# EAGLE board version1b-dump (EAGLE 6.1)
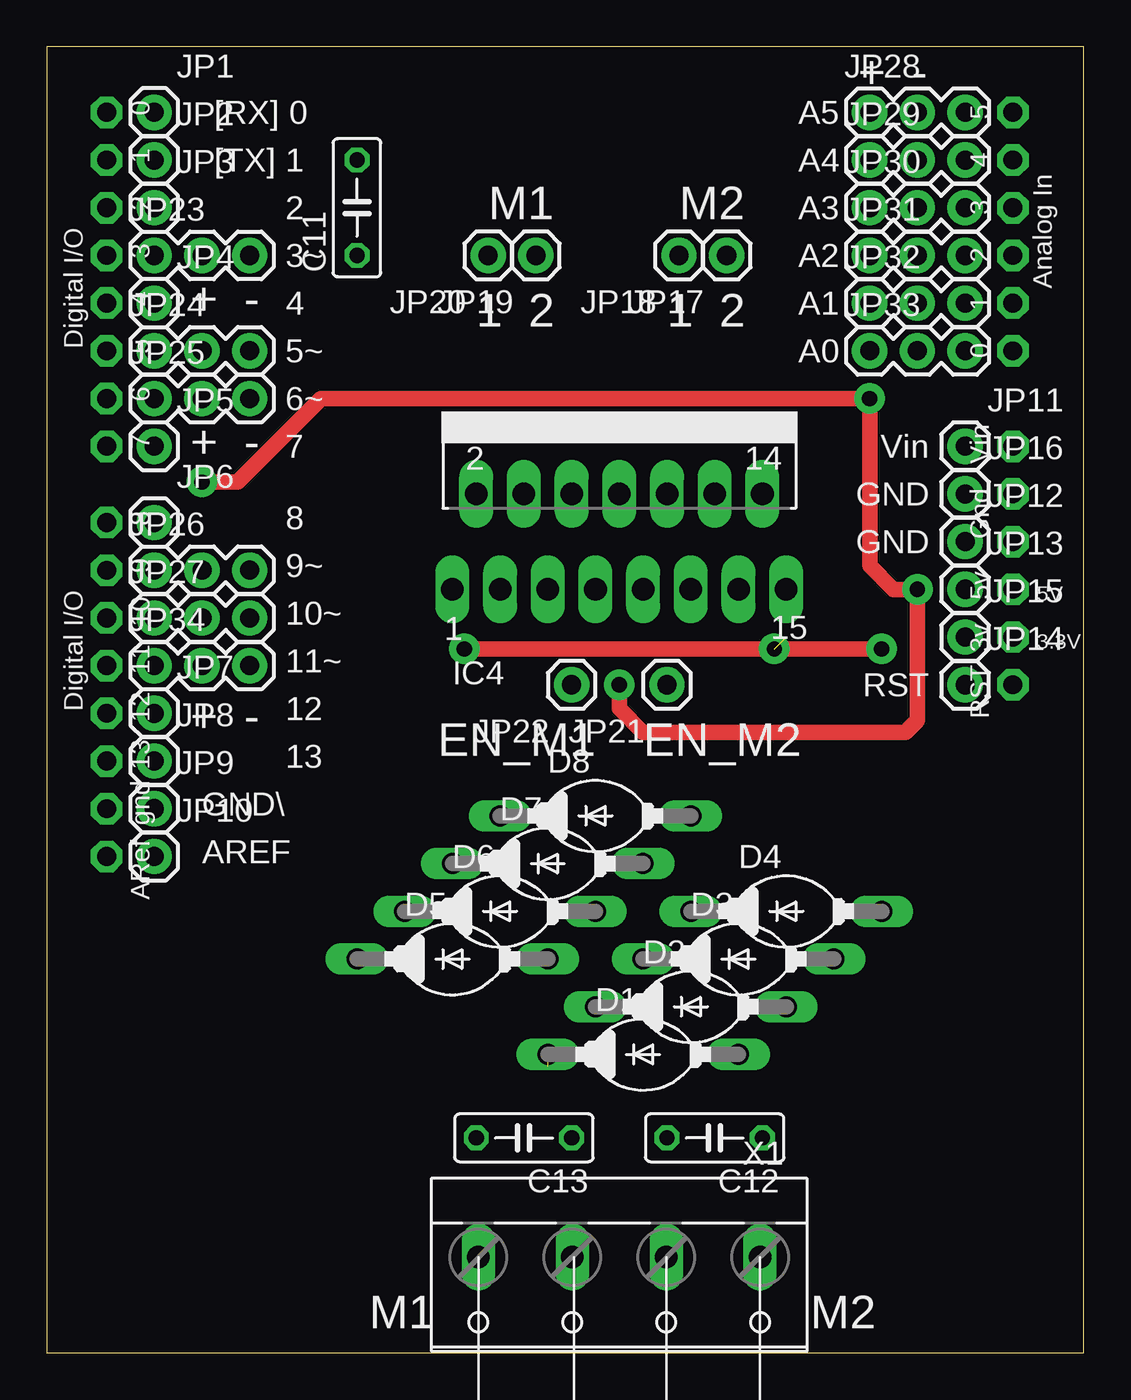
[diagram p0: board, top side]
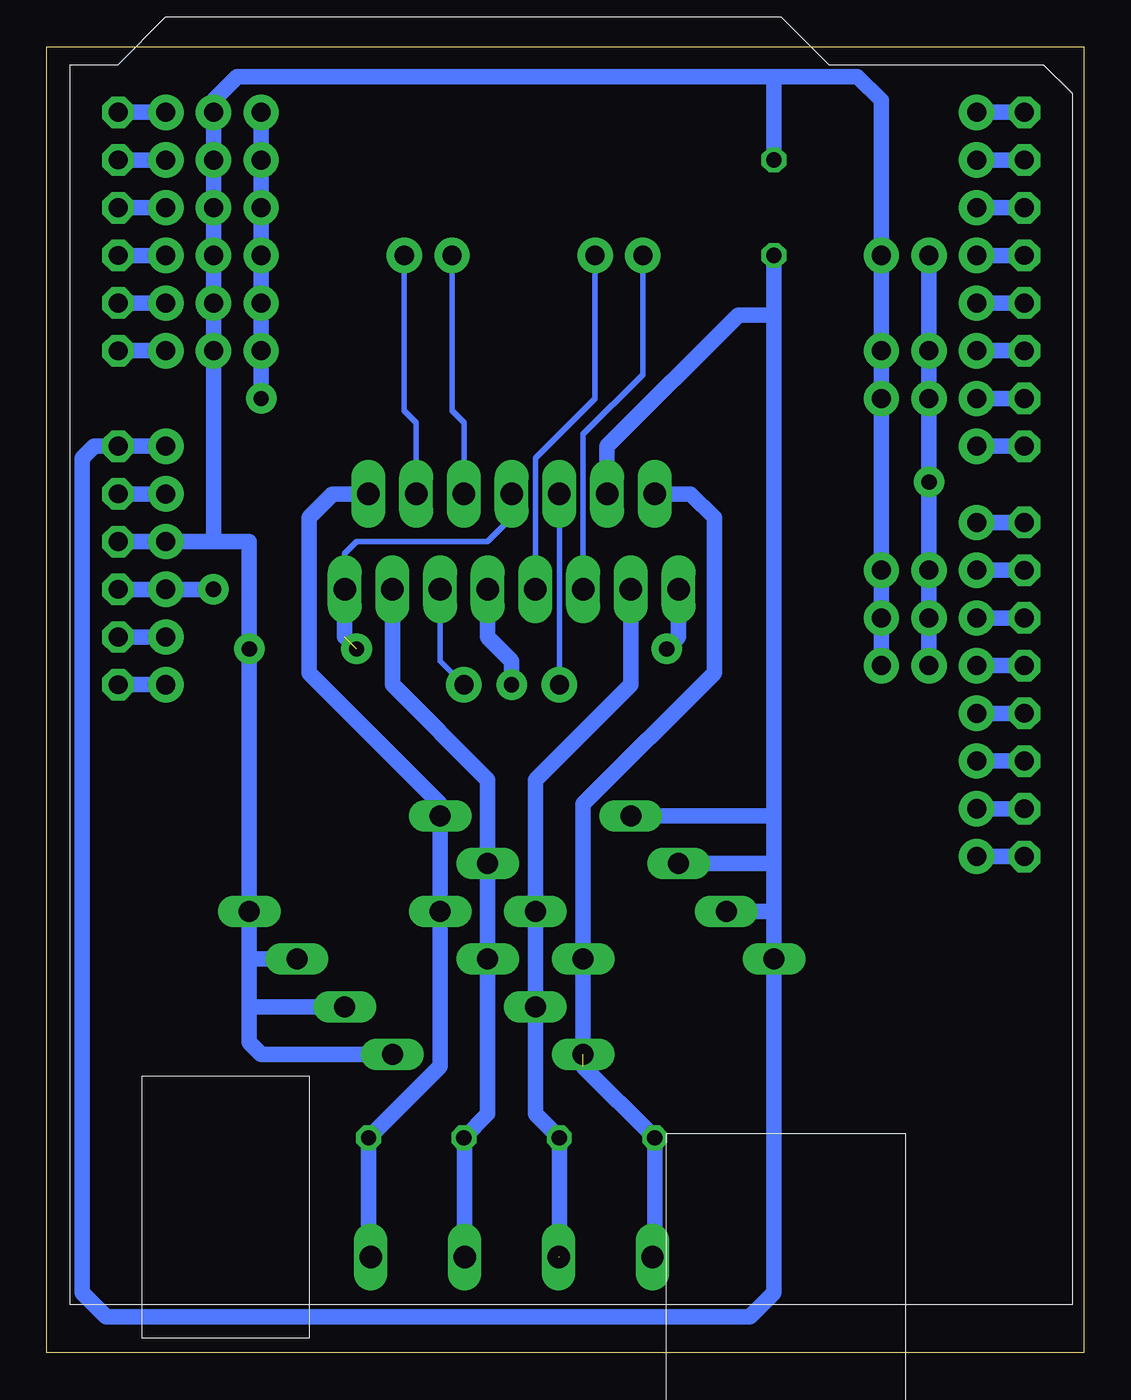
[diagram p1: board, bottom side, seen from below]

Size 55.23 x 69.52 mm. Coordinates in mm from the lower left corner, seen from the top.
Outline: 0,0 55.23,0 55.23,69.52 0,69.52 0,0
Copper layers (1*16): Top 0.035mm / dielectric 1.5mm / Bottom 0.035mm
Design rules: minimum track width 10mil, minimum drill 24mil, track to track 6mil, track to pad 6mil, pad to pad 6mil, via to via 6mil, smd to smd 6mil, copper to edge 40mil, drill to drill 8mil, minimum pad ring 10mil, minimum via ring 8mil, stop-mask expansion 4mil, vias tented up to drill 0mil, thermal gap 10mil

## Footprints (pad centres in the part's own frame; a part is rotated, then mirrored left to right if it is on the bottom)
C050-025X075 = drill 0.813 octagon: 1 -2.54,0; 2 2.54,0
DO204-10 = drill 1.118 long: A 5.08,0; C -5.08,0
MULTIWATT-15 = drill 1.2 long: 1 -8.89,-7.62; 2 -7.62,-2.54; 3 -6.35,-7.62; 4 -5.08,-2.54; 5 -3.81,-7.62; 6 -2.54,-2.54; 7 -1.27,-7.62; 8 0,-2.54; 9 1.27,-7.62; 10 2.54,-2.54; 11 3.81,-7.62; 12 5.08,-2.54; 13 6.35,-7.62; 14 7.62,-2.54; 15 8.89,-7.62
1X01 = drill 1.016 pad 1.88: 1 0,0
1X03 = drill 1.016 pad 1.88: 1 0,0; 2 2.54,0; 3 5.08,0
ARDUINO-NOHOLE = drill 1 pad 1.676 octagon: 3V 35.56,2.54; 5V 38.1,2.54; A0 50.8,2.54; A1 53.34,2.54; A2 55.88,2.54; A3 58.42,2.54; A4 60.96,2.54; A5 63.5,2.54; AREF 23.876,50.8; D0 63.5,50.8; D1 60.96,50.8; D2 58.42,50.8; D3 55.88,50.8; D4 53.34,50.8; D5 50.8,50.8; D6 48.26,50.8; D7 45.72,50.8; D8 41.656,50.8; D9 39.116,50.8; D10 36.576,50.8; D11 34.036,50.8; D12 31.496,50.8; D13 28.956,50.8; GND 26.416,50.8; GND1 43.18,2.54; GND2 40.64,2.54; RESET 33.02,2.54; VIN 45.72,2.54
W237-4 = drill 1.194 long: 1 -7.5,-1.27; 2 -2.5,-1.27; 3 2.5,-1.27; 4 7.5,-1.27

## Placement (x,y rotation side)
C11  100uF  [C050-025X075]  16.51,60.96 90 top
C12  1uF  [C050-025X075]  35.56,11.43 180 top
C13  1uF  [C050-025X075]  25.4,11.43 180 top
D1  1N5059  [DO204-10]  31.75,15.88 0 top
D2  1N5059  [DO204-10]  34.29,18.41 0 top
D3  1N5059  [DO204-10]  36.83,20.95 0 top
D4  1N5059  [DO204-10]  39.37,23.5 0 top
D5  1N5059  [DO204-10]  21.59,20.95 0 top
D6  1N5059  [DO204-10]  24.13,23.5 0 top
D7  1N5059  [DO204-10]  26.67,26.04 0 top
D8  1N5059  [DO204-10]  29.21,28.57 0 top
IC4  L298  [MULTIWATT-15]  30.48,48.26 0 top
JP1  M01PTH  [1X01]  5.71,66.04 0 top
JP2  M01PTH  [1X01]  5.71,63.5 0 top
JP3  M01PTH  [1X01]  5.71,60.96 0 top
JP4  M01PTH  [1X01]  5.71,55.88 0 top
JP5  M01PTH  [1X01]  5.71,48.26 0 top
JP6  M01PTH  [1X01]  5.71,44.2 0 top
JP7  M01PTH  [1X01]  5.71,34.04 0 top
JP8  M01PTH  [1X01]  5.71,31.5 0 top
JP9  M01PTH  [1X01]  5.71,28.96 0 top
JP10  M01PTH  [1X01]  5.71,26.42 0 top
JP11  M01PTH  [1X01]  48.89,48.26 0 top
JP12  M01PTH  [1X01]  48.89,43.18 0 top
JP13  M01PTH  [1X01]  48.89,40.64 0 top
JP14  M01PTH  [1X01]  48.89,35.56 0 top
JP15  M01PTH  [1X01]  48.89,38.1 0 top
JP16  M01PTH  [1X01]  48.89,45.72 0 top
JP17  M01PTH  [1X01]  36.2,58.42 180 top
JP18  M01PTH  [1X01]  33.66,58.42 180 top
JP19  M01PTH  [1X01]  26.04,58.42 180 top
JP20  M01PTH  [1X01]  23.49,58.42 180 top
JP21  M01PTH  [1X01]  33.02,35.56 180 top
JP22  M01PTH  [1X01]  27.94,35.56 180 top
JP23  [1X03]  5.71,58.42 0 top
JP24  [1X03]  5.71,53.34 0 top
JP25  [1X03]  5.71,50.8 0 top
JP26  [1X03]  5.71,41.66 0 top
JP27  [1X03]  5.71,39.12 0 top
JP28  [1X03]  43.81,66.04 0 top
JP29  [1X03]  43.81,63.5 0 top
JP30  [1X03]  43.81,60.96 0 top
JP31  [1X03]  43.81,58.42 0 top
JP32  [1X03]  43.81,55.88 0 top
JP33  [1X03]  43.81,53.34 0 top
JP34  [1X03]  5.71,36.58 0 top
U$1  ARDUINO-NOHOLE  [ARDUINO-NOHOLE]  53.98,2.54 90 top
X1  [W237-4]  30.48,3.81 180 top

## Library data of the parts
C11-C13 = rcl
D1-D8 = diode
IC4 = st-microelectronics; MPN: L298N; OC_FARNELL: 1589425; OC_NEWARK: 32M1527
JP1-JP34 = SparkFun
U$1 = adafruit
X1 = con-wago-500; OC_FARNELL: unknown; OC_NEWARK: unknown

## Nets
N$1: JP1.1 U$1.D0
N$2: JP2.1 U$1.D1
N$3: JP28.3 U$1.A5
N$4: JP3.1 U$1.D2
N$5: JP4.1 U$1.D4
N$6: JP29.3 U$1.A4
N$7: JP5.1 U$1.D7
N$8: JP6.1 U$1.D8
N$9: JP30.3 U$1.A3
N$10: JP7.1 U$1.D12
N$11: JP8.1 U$1.D13
N$12: JP31.3 U$1.A2
N$13: JP9.1 U$1.GND
N$14: JP23.1 U$1.D3
N$15: JP24.1 U$1.D5
N$16: JP33.3 U$1.A0
N$17: JP32.3 U$1.A1
N$18: JP10.1 U$1.AREF
N$19: JP14.1 U$1.RESET
N$20: JP25.1 U$1.D6
N$21: JP15.1 U$1.3V
N$22: JP16.1 U$1.GND1
N$23: JP27.1 U$1.D10
N$24: C13.2 D1.C D5.A IC4.2 X1.4
N$25: C13.1 D2.C D6.A IC4.3 X1.3
N$26: JP34.1 U$1.D11
N$27: C12.2 D3.C D7.A IC4.13 X1.2
N$28: C12.1 D4.C D8.A IC4.14 X1.1
N$29: IC4.6 JP22.1
N$30: JP26.1 U$1.D9
N$31: IC4.11 JP21.1
N$32: IC4.12 JP17.1
N$33: IC4.10 JP18.1
N$34: IC4.7 JP19.1
N$35: IC4.5 JP20.1
VDD: IC4.9 JP13.1 JP23.2 JP24.2 JP25.2 JP26.2 JP27.2 JP28.1 JP29.1 JP30.1 JP31.1 JP32.1 JP33.1 JP34.2 U$1.5V
VPP: C11.1 D5.C D6.C D7.C D8.C IC4.4 JP11.1 U$1.VIN
VSS: C11.2 D1.A D2.A D3.A D4.A IC4.1 IC4.8 IC4.15 JP12.1 JP23.3 JP24.3 JP25.3 JP26.3 JP27.3 JP28.2 JP29.2 JP30.2 JP31.2 JP32.2 JP33.2 JP34.3 U$1.GND2

## Tracks (layer width: path | path; a pad name or v marks a point on that pad's centre or on a via)
N$1
  Bottom 0.813: U$1.D0 JP1.1
N$2
  Bottom 0.813: U$1.D1 JP2.1
N$3
  Bottom 0.813: JP28.3 U$1.A5
N$4
  Bottom 0.813: U$1.D2 JP3.1
N$5
  Bottom 0.813: U$1.D4 JP4.1
N$6
  Bottom 0.813: JP29.3 U$1.A4
N$7
  Bottom 0.813: U$1.D7 JP5.1
N$8
  Bottom 0.813: U$1.D8 JP6.1
N$9
  Bottom 0.813: JP30.3 U$1.A3
N$10
  Bottom 0.813: U$1.D12 JP7.1
N$11
  Bottom 0.813: U$1.D13 JP8.1
N$12
  Bottom 0.813: JP31.3 U$1.A2
N$13
  Bottom 0.813: U$1.GND JP9.1
N$14
  Bottom 0.813: U$1.D3 JP23.1
N$15
  Bottom 0.813: U$1.D5 JP24.1
N$16
  Bottom 0.813: JP33.3 U$1.A0
N$17
  Bottom 0.813: JP32.3 U$1.A1
N$18
  Bottom 0.813: U$1.AREF JP10.1
N$19
  Bottom 0.813: JP14.1 U$1.RESET
N$20
  Bottom 0.813: U$1.D6 JP25.1
N$21
  Bottom 0.813: JP15.1 U$1.3V
N$22
  Bottom 0.813: JP16.1 U$1.GND1
N$23
  Bottom 0.813: U$1.D10 JP27.1
N$24  (1 unrouted)
  Bottom 0.813: X1.4 22.98,5.83 22.86,5.96 C13.2 26.67,15.24 26.67,19.68 D5.A 26.67,29.21 19.68,36.2 19.68,44.45 20.95,45.72 IC4.2
N$25  (1 unrouted)
  Bottom 0.813: IC4.3 24.13,35.56 29.21,30.48 D6.A 29.21,22.23 D2.C 29.21,12.7 C13.1 27.94,5.08
N$26
  Bottom 0.813: U$1.D11 JP34.1
N$27
  Bottom 0.813: X1.2 32.98,11.39 C12.2 31.75,12.7 D3.C 31.75,24.77 D7.A 31.75,30.48 36.83,35.56 IC4.13
N$28
  Bottom 0.813: X1.1 37.98,5.83 38.1,5.96 C12.1 34.29,15.24 D4.C 34.29,27.3 D8.A 34.29,29.21 41.27,36.2 41.27,44.45 40,45.72 IC4.14
N$29
  Bottom 0.305: JP22.1 IC4.6
N$30
  Bottom 0.813: U$1.D9 JP26.1
N$31
  Bottom 0.305: IC4.11 34.29,36.83 JP21.1
N$32
  Bottom 0.305: JP17.1 36.2,50.16 35.56,49.53 IC4.12
N$33
  Bottom 0.305: JP18.1 33.66,50.16 33.02,49.53 IC4.10
N$34
  Bottom 0.305: JP19.1 26.04,50.8 29.21,47.62 IC4.7
N$35
  Bottom 0.305: IC4.5 26.67,48.9 23.49,52.07 JP20.1
VDD  (via drill 0.81 pad 1.63)
  Top 0.813: v8.26,46.35 10.16,46.35 14.61,50.8 v43.81,50.8 43.81,41.91 45.09,40.64 v46.35,40.64 46.35,33.66 45.72,33.02 31.75,33.02 30.48,34.29 v30.48,35.56
  Bottom 0.813: U$1.5V JP13.1 v46.35,40.64 | JP34.2 JP27.2 JP26.2 v8.26,46.35 JP25.2 JP24.2 JP23.2 | JP28.1 JP29.1 JP30.1 JP31.1 JP32.1 JP33.1 v43.81,50.8 | IC4.9 31.75,38.1 30.48,36.83 v30.48,35.56
VPP
  Bottom 0.813: IC4.4 25.4,48.26 18.41,55.24 16.51,55.24 | 16.51,26.04 16.51,23.5 | 16.51,23.5 D5.C 16.51,3.17 17.78,1.91 52.07,1.91 53.34,3.17 53.34,47.62 52.7,48.26 U$1.VIN JP11.1 | D6.C 16.51,23.5 | D7.C 16.51,26.04 | C11.1 16.51,55.24 | 16.51,26.04 16.51,28.57 | 16.51,28.57 16.51,55.24 | D8.C 16.51,28.57
VSS  (via drill 0.81 pad 1.63)  (1 unrouted)
  Top 0.813: v22.22,37.47 v38.73,37.47 v44.45,37.47
  Bottom 0.305: IC4.8 30.48,44.45 31.75,43.18 38.73,43.18 39.37,42.55 IC4.15
  Bottom 0.813: U$1.GND2 JP12.1 46.35,43.18 | JP34.3 JP27.3 JP26.3 JP25.3 JP24.3 JP23.3 10.79,66.67 12.07,67.94 16.51,67.94 | 46.35,43.18 JP33.2 JP32.2 JP31.2 JP30.2 JP29.2 JP28.2 46.35,66.67 45.09,67.94 16.51,67.94 | IC4.15 39.37,38.1 | v22.22,37.47 21.59,38.1 IC4.1 | D1.A 43.81,15.88 44.45,16.51 44.45,18.41 | 44.45,18.41 44.45,20.95 | D2.A 44.45,18.41 | D3.A 44.45,20.95 | C11.2 16.51,67.94 | 44.45,20.95 D4.A v44.45,37.47 44.45,43.18 46.35,43.18

## Text on the board
tSilk: + - | [RX] 0 | A5 | [TX] 1 | A4 | 2 | M1 | M2 | A3 | 3~ | A2 | + - | 4 | 1 2 | 1 2 | A1 | 5~ | A0 | 6~ | + - | 7 | Vin | GND | 8 | GND | 9~ | 5V | 10~ | 3.3V | 11~ | RST | 12 | + - | EN_M1 | EN_M2 | 13 | GND\ | AREF | M1 | M2